# Altium PCB Tassel43_Without_RGB.pcbdoc
Units mil, origin at the board's own origin, x right, y up, seen from the top; angles counter-clockwise.
Board outline 9900 x 3900 mil, 2 copper layers (Top Layer, Bottom Layer); 90 components, 67 nets, 200 pads, 52 vias.
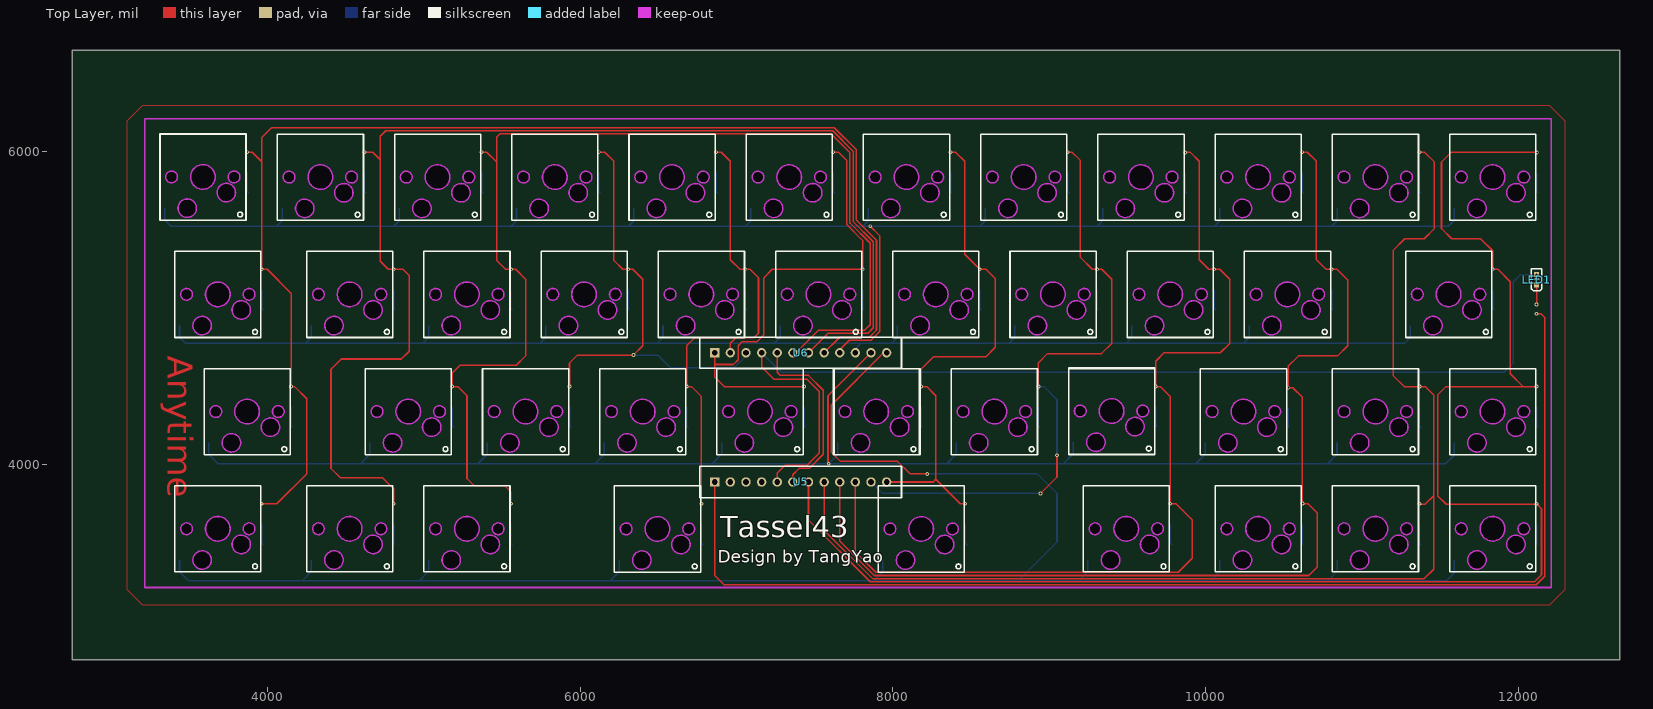
[diagram p0: Top Layer view]
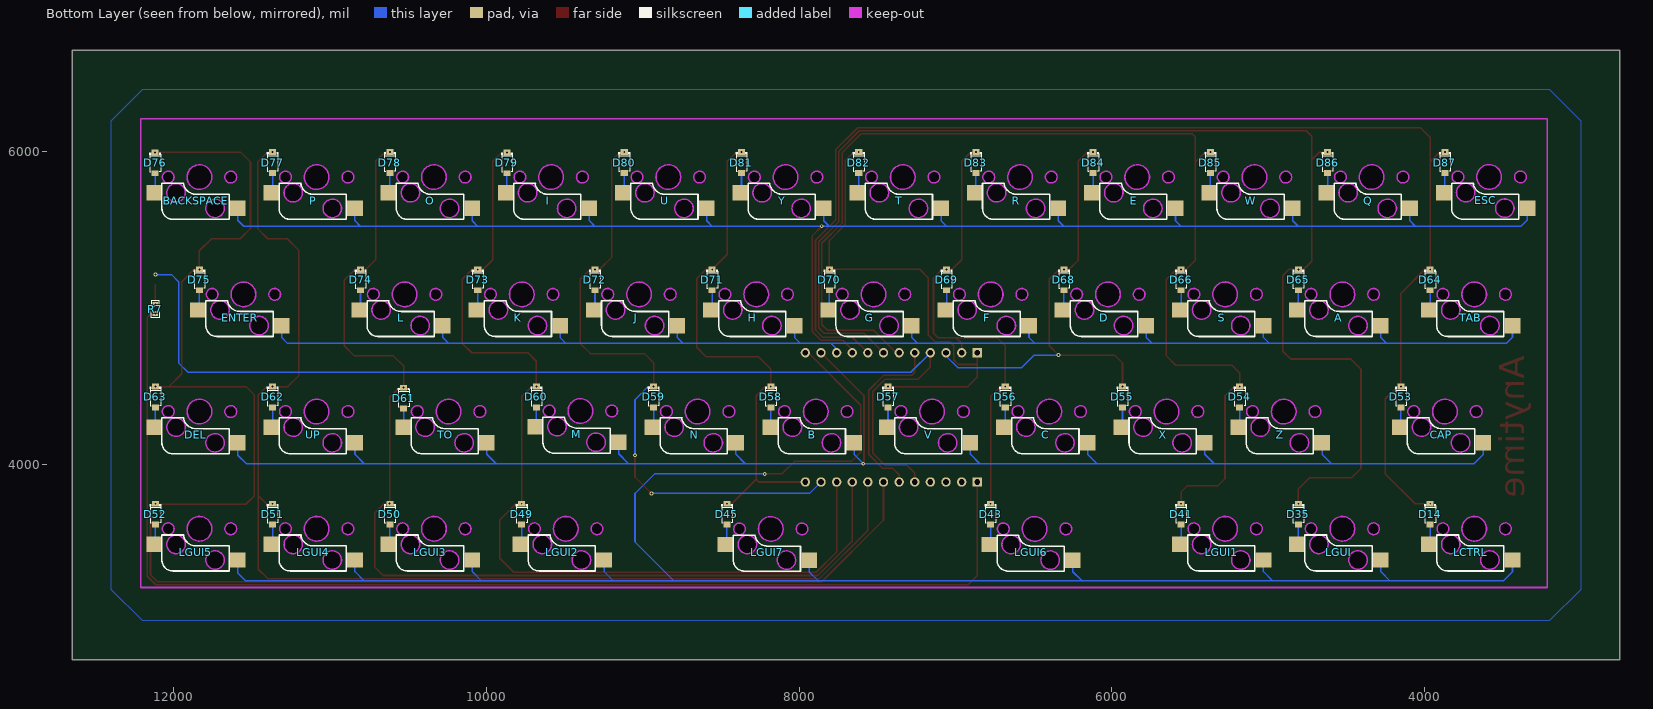
[diagram p1: Bottom Layer view, seen from below]

## Layer stack, top to bottom
Top Layer: signal copper (thickness not stored)
Dielectric: dielectric 12.6, FR-4, Dk 4.8
Bottom Layer: signal copper (thickness not stored)

## Board outline
12650,2750 2750,2750 2750,6650 12650,6650

## Components (designator, comment, footprint, x,y, rotation, side; value= is the part's Value field where it differs from the comment)
A "凯华热插拨" 凯华热插拨 4524.24,5088.9 r0 top
B "凯华热插拨" 凯华热插拨 7893.21,4338.89 r0 top
BACKSPACE "凯华热插拨" 凯华热插拨 11836.74,5838.89 r0 top
C "凯华热插拨" 凯华热插拨 6399.17,4338.89 r0 top
CAP "凯华热插拨" 凯华热插拨 3867.93,4338.89 r0 top
D "凯华热插拨" 凯华热插拨 6024.24,5088.9 r0 top
D14 "1N4148W" SOD-123_L2.8-W1.8-LS3.7-RD 3962.26,3682 r270 bottom
D35 "1N4148W" SOD-123_L2.8-W1.8-LS3.7-RD 4806.02,3682 r270 bottom
D41 "1N4148W" SOD-123_L2.8-W1.8-LS3.7-RD 5556.04,3682 r270 bottom
D43 "1N4148W" SOD-123_L2.8-W1.8-LS3.7-RD 6774.82,3682 r270 bottom
D45 "1N4148W" SOD-123_L2.8-W1.8-LS3.7-RD 8462.35,3682 r270 bottom
D49 "1N4148W" SOD-123_L2.8-W1.8-LS3.7-RD 9774.88,3682 r270 bottom
D50 "1N4148W" SOD-123_L2.8-W1.8-LS3.7-RD 10618.65,3682 r270 bottom
D51 "1N4148W" SOD-123_L2.8-W1.8-LS3.7-RD 11368.67,3682 r270 bottom
D52 "1N4148W" SOD-123_L2.8-W1.8-LS3.7-RD 12118.68,3682 r270 bottom
D53 "1N4148W" SOD-123_L2.8-W1.8-LS3.7-RD 4149.76,4432.01 r270 bottom
D54 "1N4148W" SOD-123_L2.8-W1.8-LS3.7-RD 5181.03,4432.01 r270 bottom
D55 "1N4148W" SOD-123_L2.8-W1.8-LS3.7-RD 5931.05,4432.01 r270 bottom
D56 "1N4148W" SOD-123_L2.8-W1.8-LS3.7-RD 6681.06,4432.01 r270 bottom
D57 "1N4148W" SOD-123_L2.8-W1.8-LS3.7-RD 7431.08,4432.01 r270 bottom
D58 "1N4148W" SOD-123_L2.8-W1.8-LS3.7-RD 8181.1,4432.01 r270 bottom
D59 "1N4148W" SOD-123_L2.8-W1.8-LS3.7-RD 8931.11,4432.01 r270 bottom
D60 "1N4148W" SOD-123_L2.8-W1.8-LS3.7-RD 9681.13,4432.01 r270 bottom
D61 "1N4148W" SOD-123_L2.8-W1.8-LS3.7-RD 10530,4425 r270 bottom
D62 "1N4148W" SOD-123_L2.8-W1.8-LS3.7-RD 11368.67,4432.01 r270 bottom
D63 "1N4148W" SOD-123_L2.8-W1.8-LS3.7-RD 12118.68,4432.01 r270 bottom
D64 "1N4148W" SOD-123_L2.8-W1.8-LS3.7-RD 3962.26,5182.03 r270 bottom
D65 "1N4148W" SOD-123_L2.8-W1.8-LS3.7-RD 4806.02,5182.03 r270 bottom
D66 "1N4148W" SOD-123_L2.8-W1.8-LS3.7-RD 5556.04,5182.03 r270 bottom
D68 "1N4148W" SOD-123_L2.8-W1.8-LS3.7-RD 6306.06,5182.03 r270 bottom
D69 "1N4148W" SOD-123_L2.8-W1.8-LS3.7-RD 7056.07,5182.03 r270 bottom
D70 "1N4148W" SOD-123_L2.8-W1.8-LS3.7-RD 7806.09,5182.03 r270 bottom
D71 "1N4148W" SOD-123_L2.8-W1.8-LS3.7-RD 8556.1,5182.03 r270 bottom
D72 "1N4148W" SOD-123_L2.8-W1.8-LS3.7-RD 9306.12,5182.03 r270 bottom
D73 "1N4148W" SOD-123_L2.8-W1.8-LS3.7-RD 10056.14,5182.03 r270 bottom
D74 "1N4148W" SOD-123_L2.8-W1.8-LS3.7-RD 10806.15,5182.03 r270 bottom
D75 "1N4148W" SOD-123_L2.8-W1.8-LS3.7-RD 11837.42,5182.03 r270 bottom
D76 "1N4148W" SOD-123_L2.8-W1.8-LS3.7-RD 12120,5930 r270 bottom
D77 "1N4148W" SOD-123_L2.8-W1.8-LS3.7-RD 11368.67,5932.05 r270 bottom
D78 "1N4148W" SOD-123_L2.8-W1.8-LS3.7-RD 10618.65,5932.05 r270 bottom
D79 "1N4148W" SOD-123_L2.8-W1.8-LS3.7-RD 9870,5930 r270 bottom
D80 "1N4148W" SOD-123_L2.8-W1.8-LS3.7-RD 9118.62,5932.05 r270 bottom
D81 "1N4148W" SOD-123_L2.8-W1.8-LS3.7-RD 8368.6,5932.05 r270 bottom
D82 "1N4148W" SOD-123_L2.8-W1.8-LS3.7-RD 7618.59,5932.05 r270 bottom
D83 "1N4148W" SOD-123_L2.8-W1.8-LS3.7-RD 6868.57,5932.05 r270 bottom
D84 "1N4148W" SOD-123_L2.8-W1.8-LS3.7-RD 6118.55,5932.05 r270 bottom
D85 "1N4148W" SOD-123_L2.8-W1.8-LS3.7-RD 5368.54,5932.05 r270 bottom
D86 "1N4148W" SOD-123_L2.8-W1.8-LS3.7-RD 4618.52,5932.05 r270 bottom
D87 "1N4148W" SOD-123_L2.8-W1.8-LS3.7-RD 3868.51,5932.05 r270 bottom
DEL "凯华热插拨" 凯华热插拨 11836.66,4338.89 r0 top
E "凯华热插拨" 凯华热插拨 5836.74,5838.89 r0 top
ENTER "凯华热插拨" 凯华热插拨 11555.45,5088.9 r0 top
ESC "凯华热插拨" 凯华热插拨 3585,5840 r0 top
F "凯华热插拨" 凯华热插拨 6774.23,5088.9 r0 top
G "凯华热插拨" 凯华热插拨 7524.23,5088.9 r0 top
H "凯华热插拨" 凯华热插拨 8274.24,5088.9 r0 top
I "凯华热插拨" 凯华热插拨 9586.74,5838.89 r0 top
J "凯华热插拨" 凯华热插拨 9024.24,5088.9 r0 top
K "凯华热插拨" 凯华热插拨 9774.24,5088.9 r0 top
L "凯华热插拨" 凯华热插拨 10524.25,5088.9 r0 top
LCTRL "凯华热插拨" 凯华热插拨 3680.49,3588.89 r0 top
LED1 "TJ-S1608SW6TGLC2R-A5" LED0603-R-RD_RED 12118.68,5182.03 r90 top
LGUI "凯华热插拨" 凯华热插拨 4524.24,3588.89 r0 top
LGUI1 "凯华热插拨" 凯华热插拨 5274.23,3588.89 r0 top
LGUI2 "凯华热插拨" 凯华热插拨 9492.98,3588.89 r0 top
LGUI3 "凯华热插拨" 凯华热插拨 10336.72,3588.89 r0 top
LGUI4 "凯华热插拨" 凯华热插拨 11086.72,3588.89 r0 top
LGUI5 "凯华热插拨" 凯华热插拨 11836.71,3588.89 r0 top
LGUI6 "凯华热插拨" 凯华热插拨 6493.56,3588.25 r0 top
LGUI7 "凯华热插拨" 凯华热插拨 8181.1,3588.25 r0 top
M "凯华热插拨" 凯华热插拨 9399.18,4342.51 r0 top
N "凯华热插拨" 凯华热插拨 8649.19,4338.89 r0 top
O "凯华热插拨" 凯华热插拨 10336.74,5838.89 r0 top
P "凯华热插拨" 凯华热插拨 11086.74,5838.89 r0 top
Q "凯华热插拨" 凯华热插拨 4336.74,5838.89 r0 top
R "凯华热插拨" 凯华热插拨 6586.74,5838.89 r0 top
R7 "1kΩ" R0603 12118.68,4994.53 r90 bottom
S "凯华热插拨" 凯华热插拨 5274.24,5088.9 r0 top
T "凯华热插拨" 凯华热插拨 7336.68,5838.89 r0 top
TAB "凯华热插拨" 凯华热插拨 3680.49,5088.9 r0 top
TO "凯华热插拨" 凯华热插拨 10242.92,4338.89 r0 top
U "凯华热插拨" 凯华热插拨 8836.74,5838.89 r0 top
U5 "1X12排针" 1X12排针 6960,3788.23 r90 top
U6 "1X12排针" 1X12排针 6960,4615 r90 top
UP "凯华热插拨" 凯华热插拨 11086.67,4338.89 r0 top
V "凯华热插拨" 凯华热插拨 7149.19,4338.89 r0 top
W "凯华热插拨" 凯华热插拨 5086.74,5838.89 r0 top
X "凯华热插拨" 凯华热插拨 5649.17,4338.89 r0 top
Y "凯华热插拨" 凯华热插拨 8086.66,5838.89 r0 top
Z "凯华热插拨" 凯华热插拨 4899.17,4338.89 r0 top

## Footprints (in the part's own frame and the unit in brackets; to place one, negate y for a bottom-side part, rotate by r counter-clockwise, add the part's x,y. Pads: shape width x height; smd on the part's side, far side on the other; paste and mask are expansions set on the pad)
1X12排针 [mil]
  rect 60x60 hole 36: 1(100,100.01)
  round 60 hole 36 copper offset -0.01,0.01: 2(100.02,-0.01) 3(100.02,-100.01) 4(100.02,-200.01) 5(100.02,-300.01) 6(100.02,-400.01) 7(100.02,-500.01) 8(100.02,-600.01) 9(100.02,-700.01) 10(100.02,-800.01) 11(100.02,-900.01) 12(100.02,-1000.01)
  silkscreen extent 0,-1095 200,195
LED0603-R-RD_RED [mm]
  rect 0.8x0.8 smd: 1(0.851,0) 2(-0.851,0)
  silkscreen extent -1.82,-0.86 1.77,0.86
R0603 [mil]
  rect 31.75x34.02 smd: 1(-29.66,0) 2(29.65,0)
  silkscreen extent -55,-26 55,26
SOD-123_L2.8-W1.8-LS3.7-RD [mm]
  rect 0.95x1.15 smd: 1(-1.692,0) 2(1.692,0)
  silkscreen extent -1.63,-0.94 1.41,0.94
凯华热插拨 [mm]
  rect 2.55x2.5 smd far side: K1(-6.223,-5.08) K2(7.366,-2.54)
  Multi-Layer board cut-out: 2,0 1.729,0.996 0.997,1.724 0,1.99 -0.997,1.724 -1.729,0.996 -2,0 -2,0 -1.729,-0.996 -0.997,-1.724 0,-1.99 0.997,-1.724 1.729,-0.996 2,0
  Multi-Layer board cut-out: -1.04,-5.08 -1.189,-4.429 -1.605,-3.907 -2.206,-3.618 -2.874,-3.617 -3.475,-3.907 -3.891,-4.429 -4.04,-5.08 -4.04,-5.08 -3.839,-5.83 -3.29,-6.379 -2.54,-6.58 -1.79,-6.379 -1.241,-5.83 -1.04,-5.08
  Multi-Layer board cut-out: 5.31,-2.54 5.161,-1.889 4.745,-1.367 4.144,-1.078 3.476,-1.077 2.875,-1.367 2.459,-1.889 2.31,-2.54 2.31,-2.54 2.511,-3.29 3.06,-3.839 3.81,-4.04 4.56,-3.839 5.109,-3.29 5.31,-2.54
  Multi-Layer board cut-out: -4.127,0 -4.257,0.473 -4.606,0.819 -5.08,0.946 -5.554,0.819 -5.903,0.473 -6.032,0 -6.032,0 -5.903,-0.473 -5.554,-0.819 -5.08,-0.945 -4.606,-0.819 -4.257,-0.473 -4.128,0
  Multi-Layer board cut-out: 6.032,0 5.903,0.473 5.554,0.819 5.08,0.946 4.606,0.819 4.257,0.473 4.128,0 4.128,0 4.257,-0.473 4.606,-0.819 5.08,-0.945 5.554,-0.819 5.903,-0.473 6.032,0
  silkscreen extent -6.98,-7.01 7.01,6.98

## Via types
v1: diameter 24, hole 12, Top Layer to Bottom Layer, 52 vias

## Nets (pads, with @x,y where several pads share a name; then routed paths per layer and width w, separated by ;. In a path a pad name is that pad's centre, name@x,y a point inside that pad or via, vN(x,y) a via of type N, cw(c..) or ccw(c..) an arc to the next point about the centre after c; other vN are vias at no path point)
A1_4: A.K2 D65.2 | length 129.9
  Bottom Layer w10: D65.2 4806.03,4997.1 A.K2
B1_4: B.K2 D58.2 | length 127.4
  Bottom Layer w10: D58.2 8181.1,4241 B.K2
C9_4: C.K2 D56.2 | length 129.8
  Bottom Layer w10: D56.2 6681.07,4246.99 C.K2
CAPLED: R7.1 U5.1 | length 7674.7
  Top Layer w10: U5.1@6861.3,3888.3 6861.3,3288.7 6920,3230 12116.2,3230 12171.3,3285.1 12171.3,4940.1 12146.4,4965 v1(12118.68,4964.87)
CAPS1_4: D49.2 LGUI2.K2 | length 129.8
  Bottom Layer w10: D49.2 9774.88,3496.99 LGUI2.K2
COL0: D14.1 D53.1 D64.1 D87.1 U6.8 | length 8280.8
  Top Layer w10: v1(3868.51,5998.68) 3901.3,5998.7 3962.3,5937.7 ; v1(3962.26,3748.63) 4058.6,3748.6 4250,3940 4250,4420 4171.4,4498.6 v1(4149.76,4498.64) 4149.8,5095.2 3996.3,5248.7 v1(3962.26,5248.66) 3962.3,5937.7 ; U6.8 7660,4815 7850,4815 7895,4860 7895,5435 7765,5565 7765,6015 7625,6155 4024.8,6155 3962.3,6092.5 3962.3,5937.7
COL1: D35.1 D65.1 D86.1 U6.7 | length 8120.7
  Top Layer w10: v1(4618.52,5998.68) 4671.3,5998.7 4720,5950 ; v1(4806.03,5248.66) 4771.3,5248.7 4720,5300 4720,5950 ; v1(4806.03,3748.63) 4806.03,3843.97 4735,3915 4465,3915 4405,3975 4405,4610 4470,4675 4855,4675 4905,4725 4905,5210 4866.34,5248.66 v1(4806.03,5248.66) ; U6.7 7585,4840 7840,4840 7875,4875 7875,5425 7745,5555 7745,6005 7615,6135 4754.84,6135 4720,6100.16 4720,5950
COL2: D41.1 D54.1 D66.1 D85.1 U6.6 | length 7320.8
  Top Layer w10: v1(5368.54,5998.68) 5401.3,5998.7 5465,5935 ; v1(5556.04,5248.66) 5521.2,5248.7 5465,5305.1 5465,5935 ; v1(5556.04,3748.63) 5556.04,3823.96 5515,3865 5320,3865 5275,3910 5275,4440 5216.36,4498.64 v1(5181.03,4498.64) 5181.03,4586.03 5230,4635 5590,4635 5650,4695 5650,5185 5586.34,5248.66 v1(5556.04,5248.66) ; U6.6 7380,4715 7525,4860 7820,4860 7855,4895 7855,5415 7725,5545 7725,5995 7605,6115 5484.9,6115 5465,6095.1 5465,5935
COL3: D55.1 D68.1 D84.1 U6.3 | length 2885.1
  Top Layer w10: v1(5931.05,4498.64) 5931,4649 5982.1,4700 v1(6340,4700) 6400,4760 6400,5185 6336.3,5248.7 v1(6306.06,5248.66) 6271.3,5248.7 6215,5305 6215,5940 6156.3,5998.7 v1@6118.5,5998.7
  Bottom Layer w10: v1(6340,4700) 6495,4700 6575,4620 6985,4620 7060,4695 U6.3
  other v1: 6118.55,5998.68
COL4: D43.1 D56.1 D69.1 D83.1 U6.2 | length 2998.3
  Top Layer w10: v1(6774.82,3748.63) 6774.8,4435.2 6711.4,4498.6 v1(6681.07,4498.64) 6681.1,4761.1 6730,4810 7110,4810 7140,4840 7140,5195 7086.3,5248.7 v1(7056.07,5248.66) 7021.3,5248.7 6960,5310 6960,5940 6901.3,5998.7 v1(6868.57,5998.68) ; U6.2 6960.01,4775.45 6994.56,4810
COL5: D57.1 D70.1 D82.1 U6.1 | length 3063.1
  Top Layer w10: 6860,4640 6980,4640 7010,4670 7010,4760 7035,4785 7130,4785 7175,4830 7175,5195 7228.7,5248.7 v1(7806.09,5248.66) 7806.1,5433.9 7705,5535 7705,5945 7651.3,5998.7 v1(7618.59,5998.68) ; U6.1 6860,4560 6921.4,4498.6 v1(7431.08,4498.64)
COL6: D45.1 D58.1 D71.1 D81.1 U5.12 | length 3281.2
  Top Layer w10: U5.12@7960.01,3888.24 8258.24,3888.24 8275,3905 ; v1(8368.6,5998.68) 8401.32,5998.68 8460,5940 8460,5344.77 v1(8556.11,5248.66) ; v1@8462.3,3748.6 8431.4,3748.6 8275,3905 ; v1(8556.11,5248.66) 8596.3,5248.7 8655,5190 8655,4750 8595,4690 8260,4690 8181.1,4611.1 v1(8181.1,4498.64) 8216.4,4498.6 8275,4440 8275,3905
  other v1: 8462.35,3748.63
COL7: D59.1 D72.1 D80.1 U5.11 | length 3976.7
  Top Layer w10: v1(8931.11,4498.64) 8931.1,4651.1 8990,4710 9335,4710 9400,4775 9400,5185 9336.3,5248.7 v1(9306.12,5248.66) 9276.3,5248.7 9200,5325 9200,5945 9146.3,5998.7 v1(9118.62,5998.68) ; v1(8945,3815) 9050,3920 v1(9050,4059.42)
  Bottom Layer w10: U5.11@7860.01,3888.24 7933.25,3815 v1(8945,3815) ; v1(8931.11,4498.64) 8966.4,4498.6 9050,4415 v1(9050,4059.42)
COL8: D49.1 D60.1 D73.1 D79.1 U5.10 | length 6012.7
  Top Layer w10: U5.10@7760,3888.2 7760,3440 7890,3310 9825,3310 9915,3400 9915,3645 9811.4,3748.6 v1(9774.88,3748.63) 9774.9,4435.1 9711.4,4498.6 v1(9681.13,4498.64) 9681.1,4661.1 9735,4715 10095,4715 10155,4775 10155,5185 10091.3,5248.7 v1(10056.14,5248.66) 10021.3,5248.7 9960,5310 9960,5940 9903.4,5996.6 v1(9870,5996.63)
COL9: D50.1 D61.1 D74.1 D78.1 U5.9 | length 6799.2
  Top Layer w10: U5.9@7660,3888.2 7660,3510 7880,3290 10660,3290 10715,3345 10715,3690 10655,3750 v1(10620,3750) 10620,4430 10558.37,4491.63 v1(10530,4491.63) ; v1(10530,4491.63) 10530,4630 10595,4695 10845,4695 10910,4760 10910,5180 10841.3,5248.7 v1(10806.15,5248.66) 10771.3,5248.7 10710,5310 10710,5940 10651.3,5998.7 v1@10618.7,5998.7
  other v1: 10618.65,5998.68
COL10: D51.1 D62.1 D77.1 U5.8 | length 7574.6
  Top Layer w10: U5.8@7560,3888.2 7560,3580 7870,3270 11400,3270 11460,3330 11460,3800 ; v1(11368.67,3748.63) 11372.3,3745 11405,3745 11460,3800 ; v1(11368.67,4498.64) 11406.36,4498.64 11460,4445 11460,3800 ; v1(11368.67,4498.64) 11271.4,4498.6 11200,4570 11200,5370 11275,5445 11400,5445 11465,5510 11465,5935 11401.3,5998.7 v1(11368.67,5998.68)
COL11: D52.1 D63.1 D75.1 D76.1 U5.7 | length 9957
  Top Layer w10: U5.7@7460,3888.2 7460,3645 7855,3250 12105,3250 12150,3295 12150,3717.3 v1(12118.68,3748.63) ; v1(12118.68,3748.63) 12115.05,3745 11540,3745 11485,3800 11485,4445 11538.6,4498.6 12031.4,4498.6 ; v1(12118.68,4498.64) 12031.4,4498.6 ; v1(12120,5996.63) 11571.6,5996.6 11510,5935 11510,5510 11575,5445 11760,5445 11837.4,5367.6 v1(11837.43,5248.66) 11871.3,5248.7 11950,5170 11950,4580 12031.4,4498.6
D14_2: D14.2 LCTRL.K2 | length 129.9
  Bottom Layer w10: D14.2 3962.26,3497.12 LCTRL.K2
D53_2: CAP.K2 D53.2 | length 129.9
  Bottom Layer w10: D53.2 4149.76,4247.06 CAP.K2
D64_2: D64.2 TAB.K2 | length 129.9
  Bottom Layer w10: D64.2 3962.26,4997.13 TAB.K2
D67_4: D68.2 D.K2 | length 129.9
  Bottom Layer w10: D68.2 6306.06,4997.07 D.K2
D76_2: BACKSPACE.K2 D76.2 | length 127.3
  Bottom Layer w10: D76.2 12120,5745.63 BACKSPACE.K2
D77_2: D77.2 P.K2 | length 129.9
  Bottom Layer w10: D77.2 11368.67,5746.96 P.K2
D78_2: D78.2 O.K2 | length 129.9
  Bottom Layer w10: D78.2@10618.65,5865.42 10618.65,5746.98 O.K2
D79_2: D79.2 I.K2 | length 127.3
  Bottom Layer w10: D79.2 9870,5745.63 I.K2
D80_2: D80.2 U.K2 | length 129.9
  Bottom Layer w10: D80.2 9118.62,5747.02 U.K2
D81_2: D81.2 Y.K2 | length 129.9
  Bottom Layer w10: D81.2 8368.6,5746.96 Y.K2
D82_2: D82.2 T.K2 | length 129.9
  Bottom Layer w10: D82.2 7618.59,5746.98 T.K2
D83_2: D83.2 R.K2 | length 129.9
  Bottom Layer w10: D83.2 6868.57,5747.06 R.K2
D84_2: D84.2 E.K2 | length 129.9
  Bottom Layer w10: D84.2 6118.55,5747.08 E.K2
D85_2: D85.2 W.K2 | length 129.9
  Bottom Layer w10: D85.2 5368.54,5747.09 W.K2
D86_2: D86.2 Q.K2 | length 129.9
  Bottom Layer w10: D86.2 4618.52,5747.11 Q.K2
D+: U5.3
D-: U5.2
DEL1_4: D63.2 DEL.K2 | length 129.8
  Bottom Layer w10: D63.2 12118.68,4246.87 DEL.K2
DOWN1_4: D51.2 LGUI4.K2 | length 129.8
  Bottom Layer w10: D51.2 11368.67,3496.94 LGUI4.K2
ENTER1_4: D75.2 ENTER.K2 | length 129.8
  Bottom Layer w10: D75.2 11837.43,4996.92 ENTER.K2
ESC1_4: D87.2 ESC.K2 | length 128.1
  Bottom Layer w10: D87.2 3868.51,5746.49 ESC.K2
F1_4: D69.2 F.K2 | length 129.9
  Bottom Layer w10: D69.2 7056.07,4997.06 F.K2
G1_4: D70.2 G.K2 | length 129.9
  Bottom Layer w10: D70.2 7806.09,4997.03 G.K2
GND: U5.6 U6.5 | length 1173.3
  Top Layer w10: U6.5 7260,4590 7280,4570 7460,4570 7555,4475 7555,4065 7465,3975 7400,3975 7360,3935 U5.6@7360,3888.2
H1_4: D71.2 H.K2 | length 129.9
  Bottom Layer w10: D71.2 8556.11,4997.03 H.K2
J2_4: D72.2 J.K2 | length 129.9
  Bottom Layer w10: D72.2 9306.12,4997.02 J.K2
K1_4: D73.2 K.K2 | length 129.9
  Bottom Layer w10: D73.2 10056.14,4996.99 K.K2
L1_4: D74.2 L.K2 | length 129.9
  Bottom Layer w10: D74.2 10806.15,4997 L.K2
LALT1_4: D41.2 LGUI1.K2 | length 129.9
  Bottom Layer w10: D41.2 5556.04,3497.08 LGUI1.K2
LEFT1_4: D50.2 LGUI3.K2 | length 129.8
  Bottom Layer w10: D50.2@10618.65,3615.37 10618.65,3496.96 LGUI3.K2
LGUI1_4: D35.2 LGUI.K2 | length 129.9
  Bottom Layer w10: D35.2 4806.03,3497.1 LGUI.K2
M1_4: D60.2 M.K2 | length 126.2
  Bottom Layer w10: D60.2 9681.13,4250.56 M.K2
N1_4: D59.2 N.K2 | length 129.8
  Bottom Layer w10: D59.2 8931.11,4246.97 N.K2
R7_2: LED1.2 R7.2 | length 125.8
  Top Layer w10: v1(12118.68,5024.18) LED1.2@12118.68,5150
RGB: U5.4
RIGHT1_4: D52.2 LGUI5.K2 | length 129.8
  Bottom Layer w10: D52.2 12118.68,3496.92 LGUI5.K2
ROW0: BACKSPACE.K1 E.K1 ESC.K1 I.K1 O.K1 P.K1 Q.K1 R.K1 T.K1 U6.9 U.K1 W.K1 Y.K1 | length 10738.1
  Top Layer w10: U6.9 7660,4735 7720,4795 7860,4795 7915,4850 7915,5465 v1(7855,5525)
  Bottom Layer w10: ESC.K1 3340,5565.6 3379.5,5526.1 11553.9,5525 11591.7,5562.7 ; 4057.12,5525.1 4091.74,5559.72 Q.K1 ; 4807.12,5525.1 4841.74,5559.72 W.K1 ; 5557.12,5525.1 5591.74,5559.72 E.K1 ; 6307.12,5525.1 6341.74,5559.72 R.K1 ; 7057.06,5525.1 7091.68,5559.72 T.K1 ; 7807.05,5525.1 7841.66,5559.72 Y.K1 ; 8557.12,5525.1 8591.74,5559.72 U.K1 ; 9307.12,5525.1 9341.74,5559.72 I.K1 ; 10057.12,5525.1 10091.74,5559.72 O.K1 ; 10807.12,5525.1 10841.74,5559.72 P.K1 ; 11591.74,5562.69 BACKSPACE.K1
ROW1: A.K1 D.K1 ENTER.K1 F.K1 G.K1 H.K1 J.K1 K.K1 L.K1 S.K1 TAB.K1 U6.10 | length 9299.9
  Bottom Layer w10: TAB.K1 3435.5,4814.5 3475,4775 11272.7,4775 11310.5,4812.7 ENTER.K1 ; 4240.92,4775 4279.24,4813.32 A.K1 ; 4990.92,4775 5029.24,4813.32 S.K1 ; 5740.92,4775 5779.24,4813.32 D.K1 ; 6490.91,4775 6529.23,4813.32 F.K1 ; 7240.91,4775 7279.23,4813.32 G.K1 ; U6.10 7760.01,4740.01 7795,4775 ; 7990.92,4775 8029.24,4813.32 H.K1 ; 8740.92,4775 8779.24,4813.32 J.K1 ; 9490.92,4775 9529.24,4813.32 K.K1 ; 10240.93,4775 10279.25,4813.32 L.K1
ROW2: B.K1 C.K1 CAP.K1 DEL.K1 M.K1 N.K1 TO.K1 U6.11 UP.K1 V.K1 X.K1 Z.K1 | length 10424
  Top Layer w10: v1(7590,4005) 7585,4010 7585,4440 U6.11
  Bottom Layer w10: CAP.K1 3622.9,4064.5 3682.4,4005 11536.4,4005 11591.4,4060 DEL.K1 ; 4594.14,4005 4654.14,4065 Z.K1@4654.14,4138.9 ; 5344.14,4005 5404.14,4065 X.K1@5404.14,4138.9 ; 6094.14,4005 6154.14,4065 C.K1@6154.14,4138.9 ; 6844.15,4005 6904.15,4065 V.K1 ; v1@7588.18,4005 7648.18,4065 B.K1 ; 8344.15,4005 8404.15,4065 N.K1 ; 9094.15,4008.61 9154.15,4068.61 M.K1@9154.15,4142.52 ; 9937.89,4005 9997.89,4065 TO.K1 ; 10781.63,4005 10841.63,4065 UP.K1@10841.63,4138.9
ROW3: LCTRL.K1 LGUI1.K1 LGUI2.K1 LGUI3.K1 LGUI4.K1 LGUI5.K1 LGUI6.K1 LGUI7.K1 LGUI.K1 U6.12 | length 12482.2
  Top Layer w10: U6.12 7940,4715 7605,4380 7605,4080 7665,4020 8030,4020 8105,3945 8110,3940 v1(8220,3940)
  Bottom Layer w10: LCTRL.K1 3435.49,3314.51 3495,3255 11540,3255 11591.71,3306.71 LGUI5.K1 ; 4219.2,3255 4279.2,3315 LGUI.K1 ; 4969.19,3255 5029.19,3315 LGUI1.K1 ; 6188.52,3254.36 6248.52,3314.36 LGUI6.K1@6248.52,3388.26 ; 7876.06,3254.36 7936.06,3314.36 LGUI7.K1@7936.06,3388.26 ; v1(8220,3940) 8925,3940 9050,3815 9050,3505 8800,3255 ; 9187.94,3255 9247.94,3315 LGUI2.K1@9247.94,3388.9 ; 10031.68,3255 10091.68,3315 LGUI3.K1 ; 10781.68,3255 10841.68,3315 LGUI4.K1
RSHIFT1_4: D45.2 LGUI7.K2 | length 130.7
  Bottom Layer w10: D45.2 8462.35,3497 LGUI7.K2
S1_4: D66.2 S.K2 | length 129.9
  Bottom Layer w10: D66.2 5556.04,4997.09 S.K2
SPACE1_4: D43.2 LGUI6.K2 | length 130.7
  Bottom Layer w10: D43.2 6774.82,3496.99 LGUI6.K2
TO1_4: D61.2 TO.K2 | length 120.7
  Bottom Layer w10: D61.2 10530,4241.81 TO.K2
UP1_4: D62.2 UP.K2 | length 129.8
  Bottom Layer w10: D62.2 11368.67,4246.88 UP.K2
V1_4: D57.2 V.K2 | length 129.9
  Bottom Layer w10: D57.2 7431.08,4247 V.K2
VCC: LED1.1 U5.5 U6.4 | length 6871.1
  Top Layer w10: U6.4 7160,4625 7240,4545 7450,4545 7530,4465 7530,4075 7450,3995 7310,3995 7260,3945 U5.5@7260,3888.2
  Bottom Layer w10: U6.4 7285,4590 11910,4590 11970,4650 11970,5170 12015.5,5215.5 v1(12118.7,5215.5)
X2_4: D55.2 X.K2 | length 129.9
  Bottom Layer w10: D55.2@5931.05,4365.38 5931.05,4247.01 X.K2
Z1_4: D54.2 Z.K2 | length 129.9
  Bottom Layer w10: D54.2 5181.03,4247.03 Z.K2
"": 

## Polygon pours and split planes (outlines as drawn)
GND on Top Layer (solid, remove dead copper, pour order 0): 3100,6200 3200,6300 12200,6300 12300,6200 12300,3200 12200,3100 3200,3100 3100,3200
GND on Bottom Layer (solid, remove dead copper, pour order 4): 3200,6400 3000,6200 3000,3200 3200,3000 12200,3000 12400,3200 12400,6200 12200,6400

## Keep-outs
Board Outline Layer:
  lines w10 net "": 3212.35,3213.28 3212.35,6213.26 12212.32,6213.26 12212.32,3213.28 3212.35,3213.28
Multi-Layer:
  circle w10: c3585,5840 r78.74
  circle w10: c3485,5640 r59.05
  circle w10: c3735,5740 r59.05
  circle w10: c3385,5840 r37.5
  circle w10: c3785,5840 r37.5
  circle w10: c3680.49,5088.9 r78.74
  circle w10: c3580.49,4888.9 r59.05
  circle w10: c3830.49,4988.9 r59.05
  circle w10: c3480.49,5088.9 r37.5
  circle w10: c3880.49,5088.9 r37.5
  circle w10: c3867.93,4338.89 r78.74
  circle w10: c3767.93,4138.89 r59.05
  circle w10: c4017.93,4238.89 r59.05
  circle w10: c3667.93,4338.89 r37.5
  circle w10: c4067.93,4338.89 r37.5
  circle w10: c3680.49,3588.89 r78.74
  circle w10: c3580.49,3388.89 r59.05
  circle w10: c3830.49,3488.89 r59.05
  circle w10: c3480.49,3588.89 r37.5
  circle w10: c3880.49,3588.89 r37.5
  circle w10: c4524.24,3588.89 r78.74
  circle w10: c4424.24,3388.89 r59.05
  circle w10: c4674.24,3488.89 r59.05
  circle w10: c4324.24,3588.89 r37.5
  circle w10: c4724.24,3588.89 r37.5
  circle w10: c4336.74,5838.89 r78.74
  circle w10: c4236.74,5638.89 r59.05
  circle w10: c4486.74,5738.89 r59.05
  circle w10: c4136.74,5838.89 r37.5
  circle w10: c4536.74,5838.89 r37.5
  circle w10: c5086.74,5838.89 r78.74
  circle w10: c4986.74,5638.89 r59.05
  circle w10: c5236.74,5738.89 r59.05
  circle w10: c4886.74,5838.89 r37.5
  circle w10: c5286.74,5838.89 r37.5
  circle w10: c5836.74,5838.89 r78.74
  circle w10: c5736.74,5638.89 r59.05
  circle w10: c5986.74,5738.89 r59.05
  circle w10: c5636.74,5838.89 r37.5
  circle w10: c6036.74,5838.89 r37.5
  circle w10: c6586.74,5838.89 r78.74
  circle w10: c6486.74,5638.89 r59.05
  circle w10: c6736.74,5738.89 r59.05
  circle w10: c6386.74,5838.89 r37.5
  circle w10: c6786.74,5838.89 r37.5
  circle w10: c7336.68,5838.89 r78.74
  circle w10: c7236.68,5638.89 r59.05
  circle w10: c7486.68,5738.89 r59.05
  circle w10: c7136.68,5838.89 r37.5
  circle w10: c7536.68,5838.89 r37.5
  circle w10: c8086.66,5838.89 r78.74
  circle w10: c7986.66,5638.89 r59.05
  circle w10: c8236.67,5738.89 r59.05
  circle w10: c7886.66,5838.89 r37.5
  circle w10: c8286.67,5838.89 r37.5
  circle w10: c8836.74,5838.89 r78.74
  circle w10: c8736.74,5638.89 r59.05
  circle w10: c8986.74,5738.89 r59.05
  circle w10: c8636.74,5838.89 r37.5
  circle w10: c9036.74,5838.89 r37.5
  circle w10: c9586.74,5838.89 r78.74
  circle w10: c9486.74,5638.89 r59.05
  circle w10: c9736.74,5738.89 r59.05
  circle w10: c9386.74,5838.89 r37.5
  circle w10: c9786.74,5838.89 r37.5
  circle w10: c10336.74,5838.89 r78.74
  circle w10: c10236.74,5638.89 r59.05
  circle w10: c10486.74,5738.89 r59.05
  circle w10: c10136.74,5838.89 r37.5
  circle w10: c10536.74,5838.89 r37.5
  circle w10: c11086.74,5838.89 r78.74
  circle w10: c10986.74,5638.89 r59.05
  circle w10: c11236.74,5738.89 r59.05
  circle w10: c10886.74,5838.89 r37.5
  circle w10: c11286.74,5838.89 r37.5
  circle w10: c11836.74,5838.89 r78.74
  circle w10: c11736.74,5638.89 r59.05
  circle w10: c11986.74,5738.89 r59.05
  circle w10: c11636.74,5838.89 r37.5
  circle w10: c12036.74,5838.89 r37.5
  circle w10: c4524.24,5088.9 r78.74
  circle w10: c4424.24,4888.9 r59.05
  circle w10: c4674.24,4988.9 r59.05
  circle w10: c4324.24,5088.9 r37.5
  circle w10: c4724.24,5088.9 r37.5
  circle w10: c5274.24,5088.9 r78.74
  circle w10: c5174.24,4888.9 r59.05
  circle w10: c5424.24,4988.9 r59.05
  circle w10: c5074.24,5088.9 r37.5
  circle w10: c5474.24,5088.9 r37.5
  circle w10: c6024.24,5088.9 r78.74
  circle w10: c5924.24,4888.9 r59.05
  circle w10: c6174.24,4988.9 r59.05
  circle w10: c5824.24,5088.9 r37.5
  circle w10: c6224.24,5088.9 r37.5
  circle w10: c6774.23,5088.9 r78.74
  circle w10: c6674.23,4888.9 r59.05
  circle w10: c6924.23,4988.9 r59.05
  circle w10: c6574.23,5088.9 r37.5
  circle w10: c6974.23,5088.9 r37.5
  circle w10: c7524.23,5088.9 r78.74
  circle w10: c7424.23,4888.9 r59.05
  circle w10: c7674.23,4988.9 r59.05
  circle w10: c7324.23,5088.9 r37.5
  circle w10: c7724.23,5088.9 r37.5
  circle w10: c8274.24,5088.9 r78.74
  circle w10: c8174.24,4888.9 r59.05
  circle w10: c8424.24,4988.9 r59.05
  circle w10: c8074.24,5088.9 r37.5
  circle w10: c8474.24,5088.9 r37.5
  circle w10: c9024.24,5088.9 r78.74
  circle w10: c8924.24,4888.9 r59.05
  circle w10: c9174.24,4988.9 r59.05
  circle w10: c8824.24,5088.9 r37.5
  circle w10: c9224.24,5088.9 r37.5
  circle w10: c9774.24,5088.9 r78.74
  circle w10: c9674.24,4888.9 r59.05
  circle w10: c9924.24,4988.9 r59.05
  circle w10: c9574.24,5088.9 r37.5
  circle w10: c9974.24,5088.9 r37.5
  circle w10: c10524.25,5088.9 r78.74
  circle w10: c10424.25,4888.9 r59.05
  circle w10: c10674.25,4988.9 r59.05
  circle w10: c10324.25,5088.9 r37.5
  circle w10: c10724.25,5088.9 r37.5
  circle w10: c11555.45,5088.9 r78.74
  circle w10: c11455.45,4888.9 r59.05
  circle w10: c11705.45,4988.9 r59.05
  circle w10: c11355.45,5088.9 r37.5
  circle w10: c11755.45,5088.9 r37.5
  circle w10: c4899.17,4338.89 r78.74
  circle w10: c4799.17,4138.89 r59.05
  circle w10: c5049.17,4238.89 r59.05
  circle w10: c4699.17,4338.89 r37.5
  circle w10: c5099.17,4338.89 r37.5
  circle w10: c5649.17,4338.89 r78.74
  circle w10: c5549.17,4138.89 r59.05
  circle w10: c5799.17,4238.89 r59.05
  circle w10: c5449.17,4338.89 r37.5
  circle w10: c5849.17,4338.89 r37.5
  circle w10: c6399.17,4338.89 r78.74
  circle w10: c6299.17,4138.89 r59.05
  circle w10: c6549.17,4238.89 r59.05
  circle w10: c6199.17,4338.89 r37.5
  circle w10: c6599.17,4338.89 r37.5
  circle w10: c7149.19,4338.89 r78.74
  circle w10: c7049.19,4138.89 r59.05
  circle w10: c7299.19,4238.89 r59.05
  circle w10: c6949.19,4338.89 r37.5
  circle w10: c7349.19,4338.89 r37.5
  circle w10: c7893.21,4338.89 r78.74
  circle w10: c7793.21,4138.89 r59.05
  circle w10: c8043.21,4238.89 r59.05
  circle w10: c7693.21,4338.89 r37.5
  circle w10: c8093.21,4338.89 r37.5
  circle w10: c8649.19,4338.89 r78.74
  circle w10: c8549.19,4138.89 r59.05
  circle w10: c8799.19,4238.89 r59.05
  circle w10: c8449.19,4338.89 r37.5
  circle w10: c8849.19,4338.89 r37.5
  circle w10: c9399.18,4342.51 r78.74
  circle w10: c9299.18,4142.51 r59.05
  circle w10: c9549.18,4242.51 r59.05
  circle w10: c9199.18,4342.51 r37.5
  circle w10: c9599.18,4342.51 r37.5
  circle w10: c10242.92,4338.89 r78.74
  circle w10: c10142.92,4138.89 r59.05
  circle w10: c10392.92,4238.89 r59.05
  circle w10: c10042.92,4338.89 r37.5
  circle w10: c10442.92,4338.89 r37.5
  circle w10: c11086.67,4338.89 r78.74
  circle w10: c10986.67,4138.89 r59.05
  circle w10: c11236.67,4238.89 r59.05
  circle w10: c10886.67,4338.89 r37.5
  circle w10: c11286.67,4338.89 r37.5
  circle w10: c11836.66,4338.89 r78.74
  circle w10: c11736.66,4138.89 r59.05
  circle w10: c11986.66,4238.89 r59.05
  circle w10: c11636.66,4338.89 r37.5
  circle w10: c12036.66,4338.89 r37.5
  circle w10: c5274.23,3588.89 r78.74
  circle w10: c5174.23,3388.89 r59.05
  circle w10: c5424.23,3488.89 r59.05
  circle w10: c5074.23,3588.89 r37.5
  circle w10: c5474.23,3588.89 r37.5
  circle w10: c9492.98,3588.89 r78.74
  circle w10: c9392.98,3388.89 r59.05
  circle w10: c9642.98,3488.89 r59.05
  circle w10: c9292.98,3588.89 r37.5
  circle w10: c9692.98,3588.89 r37.5
  circle w10: c10336.72,3588.89 r78.74
  circle w10: c10236.72,3388.89 r59.05
  circle w10: c10486.72,3488.89 r59.05
  circle w10: c10136.72,3588.89 r37.5
  circle w10: c10536.72,3588.89 r37.5
  circle w10: c11086.72,3588.89 r78.74
  circle w10: c10986.72,3388.89 r59.05
  circle w10: c11236.72,3488.89 r59.05
  circle w10: c10886.72,3588.89 r37.5
  circle w10: c11286.72,3588.89 r37.5
  circle w10: c11836.71,3588.89 r78.74
  circle w10: c11736.71,3388.89 r59.05
  circle w10: c11986.71,3488.89 r59.05
  circle w10: c11636.71,3588.89 r37.5
  circle w10: c12036.71,3588.89 r37.5
  circle w10: c6493.56,3588.25 r78.74
  circle w10: c6393.56,3388.25 r59.05
  circle w10: c6643.56,3488.25 r59.05
  circle w10: c6293.56,3588.25 r37.5
  circle w10: c6693.56,3588.25 r37.5
  circle w10: c8181.1,3588.25 r78.74
  circle w10: c8081.1,3388.25 r59.05
  circle w10: c8331.1,3488.25 r59.05
  circle w10: c7981.1,3588.25 r37.5
  circle w10: c8381.1,3588.25 r37.5

## Other copper
Top Layer:
  text "Anytime" at 3360,4695 h158.74 r270

## Silkscreen, mask and mechanical layers (free items; w line width, h text height)
Top Silkscreen Layer:
  drawing of 184 lines, arcs and shapes, not listed
  text "Tassel43" at 6895,3535 h135
  text "Design by TangYao" at 6880,3370 h80
Top Solder Mask Layer:
  text "Tassel43" at 6895,3540 h135
  text "Design by TangYao" at 6880,3370 h80